# EAGLE board 218_hall (EAGLE 8.1.0)
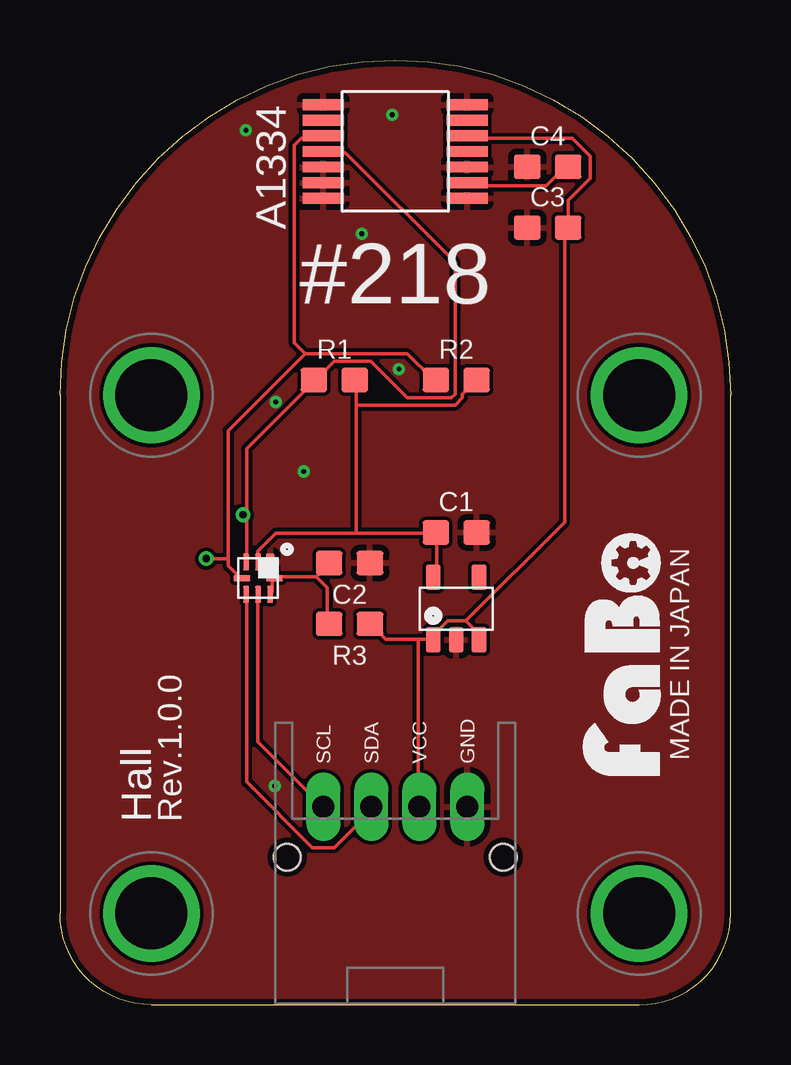
[diagram p0: board, top side]
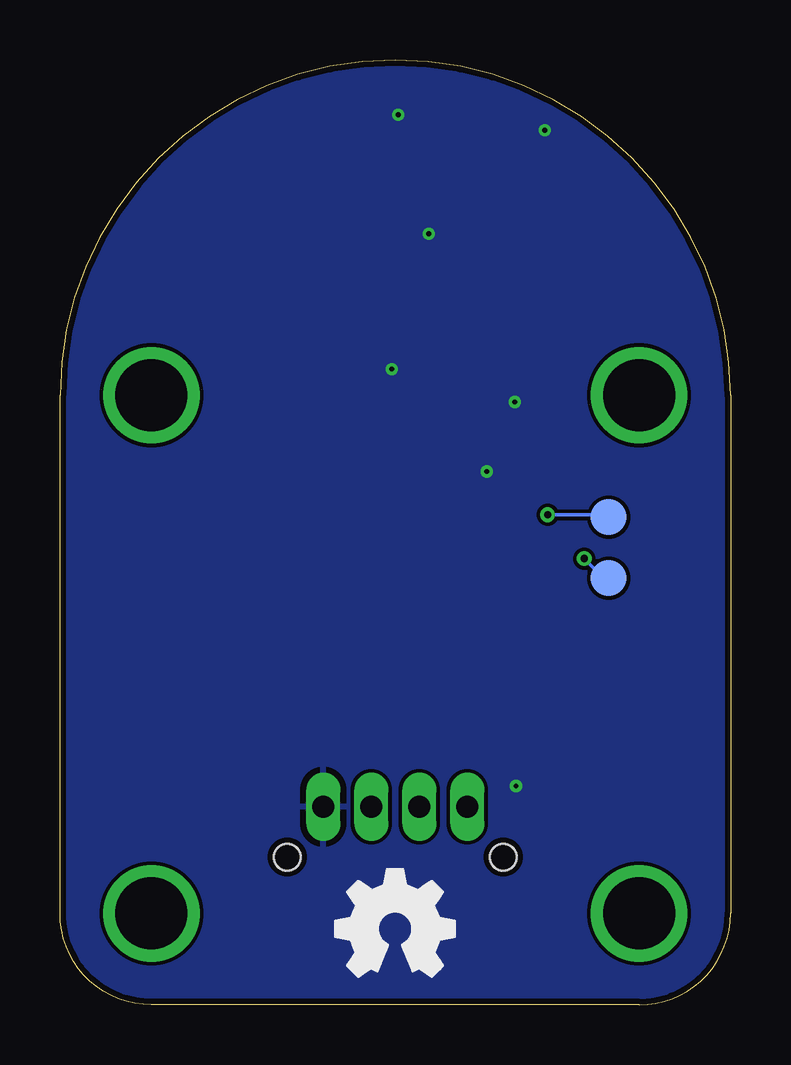
[diagram p1: board, bottom side, seen from below]

Size 27.94 x 39.37 mm. Coordinates in mm from the lower left corner, seen from the top.
Copper layers (1*16): Top 0.035mm / dielectric 1.5mm / Bottom 0.035mm
Design rules "SeeedStudio_2layer_DRU_no_angle_20140221": minimum track width 6mil, minimum drill 12mil, track to track 6mil, track to pad 6mil, pad to pad 6mil, via to via 6mil, smd to smd 0mil, copper to edge 10mil, drill to drill 10mil, minimum pad ring 10mil, minimum via ring 6mil, stop-mask expansion 2mil, vias tented up to drill 100mil, thermal gap 10mil

## Footprints (pad centres in the part's own frame; a part is rotated, then mirrored left to right if it is on the bottom)
LE-14 = smd 0.45 x 1.7: 1 -1.95,-3; 2 -1.3,-3; 3 -0.65,-3; 4 0,-3; 5 0.65,-3; 6 1.3,-3; 7 1.95,-3; 8 1.95,3; 9 1.3,3; 10 0.65,3; 11 0,3; 12 -0.65,3; 13 -1.3,3; 14 -1.95,3
0603 = smd 1.1 x 1: 1 -0.85,0; 2 0.85,0
SOT-23-5 = smd 0.6 x 1.05: 1 -0.95,-1.3; 2 0,-1.3; 3 0.95,-1.3; 4 0.95,1.3; 5 -0.95,1.3
XQFN8 = smd 0.7 x 0.35: 1 -0.675,0.5 | smd 0.7 x 0.25: 2 -0.675,0; 3 -0.675,-0.5; 5 0.675,-0.5; 6 0.675,0; 7 0.675,0.5 | smd 0.25 x 0.7: 4 0,-0.675; 8 0,0.675
FABO_BRICK_I2C = drill 0.9 pad 1.422 long: GND 3,-10.795; SCL -3,-10.795; SDA -1,-10.795; VCC 1,-10.795 | drill 3 pad 3.81: P$1 -10.16,6.35; P$2 10.16,6.35; P$3 -10.16,-15.24; P$4 10.16,-15.24 | hole 1.1: -4.5,-12.895; 4.5,-12.895
TP-15 = smd 1.5 x 1.5: 1 0,0

## Placement (x,y rotation side)
A1334  A1335  [LE-14]  13.97,35.56 90 top
C1  1uF  [0603]  16.51,19.68 180 top
C2  0.1uF  [0603]  12.06,18.41 180 top
C3  0.1uF  [0603]  20.32,32.38 0 top
C4  0.1uF  [0603]  20.32,34.92 0 top
IC2  [SOT-23-5]  16.51,16.51 0 top
IC3  [XQFN8]  8.26,17.78 270 top
J1  [FABO_BRICK_I2C]  13.97,19.05 0 top
R1  4.7k  [0603]  11.43,26.04 0 top
R2  4.7k  [0603]  16.51,26.04 0 top
R3  200k  [0603]  12.06,15.88 0 top
TP1  [TP-15]  5.08,17.78 0 bottom
TP2  [TP-15]  5.08,20.32 0 bottom
U$2  [LOGO_OSHW_M_BOTTOM]  13.97,3.17 0 top
U$3  [LOGO_FABO_MS]  25.4,14.61 90 top

## Library data of the parts
A1334 = FaBo-Sensor
C1-C4 = FaBo-Capacitor
IC2 TP1 TP2 = FaBo-Supply
IC3 = FaBo-LevelTranslator
J1 = FaBo-Template
R1-R3 = FaBo-Resistors
U$2 U$3 = FaBo-etc

## Nets
3V3: C1.2 IC2.5 IC3.2 R1.2 R2.2
5V: A1334.5 C3.2 IC2.1 IC2.3 J1.VCC R3.2
GND: A1334.1 A1334.3 A1334.7 A1334.8 A1334.12 A1334.13 A1334.14 C1.1 C2.1 C3.1 C4.1 IC2.2 IC3.1 J1.GND
N$1: A1334.2 C4.2
N$2: C2.2 IC3.7 IC3.8 R3.1
SCL: A1334.11 IC3.3 R1.1 TP2.1
SCL_HV: IC3.6 J1.SCL
SDA: A1334.10 IC3.4 R2.1 TP1.1
SDA_HV: IC3.5 J1.SDA

## Tracks (layer width: path | path; a pad name or v marks a point on that pad's centre or on a via)
3V3
  Top 0.152: 12.34,19.66 15.54,19.66 C1.2 15.7,19.66 15.7,17.83 IC2.5 | 12.34,19.66 8.99,19.66 8.23,18.9 8.23,18.59 IC3.2 | 12.34,19.66 12.34,24.99 | 12.34,24.99 12.34,25.91 R1.2 | 12.34,24.99 16.46,24.99 16.76,25.3 16.76,25.45 17.22,25.91 R2.2
5V
  Top 0.152: A1334.5 17.07,36.12 21.34,36.12 22.1,35.36 22.1,34.44 21.18,33.53 21.18,32.46 C3.2 21.03,32.31 21.03,20.12 16.92,16 | 14.94,15.24 13.56,15.24 12.95,15.85 R3.2 | 14.94,15.24 15.39,15.24 | 15.39,15.24 15.54,15.24 IC2.1 15.39,15.24 | 16.92,16 17.37,15.54 17.37,15.24 IC2.3 | 16.92,16 16.15,16 15.39,15.24 | 14.94,15.24 14.94,8.38 J1.VCC
GND  (via drill 0.2)
  other vias: 10.16,22.23 14.12,26.49 8.94,9.12 8.99,25.12 7.75,36.45 13.84,37.08 12.57,32.13
  pour Bottom: 0,0 27.94,0 27.94,39.37 0,39.37
  pour Top: 0,0 27.94,0 27.94,39.37 0,39.37
N$1
  Top 0.152: C4.2 21.03,34.9 20.27,34.14 17.07,34.14 A1334.2
N$2
  Top 0.152: IC3.7 8.84,17.22 8.84,17.68 IC3.8 8.99,17.83 10.67,17.83 | 10.67,17.83 11.12,18.29 C2.2 | 10.67,17.83 11.12,17.37 11.12,16 R3.1
SCL  (via drill 0.3)
  Top 0.152: 7.77,20.42 7.77,23.16 10.52,25.91 R1.1 10.67,26.06 11.43,26.82 12.95,26.82 14.48,25.3 16.31,25.3 16.46,25.45 16.46,30.94 11.89,35.51 10.97,35.51 A1334.11 | 7.77,20.42 7.77,18.59 IC3.3 | 7.77,20.42 v7.62,20.42
  Bottom 0.152: v7.62,20.42 5.18,20.42 TP2.1
SCL_HV
  Top 0.152: IC3.6 8.23,17.07 8.23,10.97 10.82,8.38 J1.SCL
SDA  (via drill 0.3)
  Top 0.152: 7.01,18.59 7.01,23.93 10.21,27.13 | 7.01,18.59 7.01,18.29 7.47,17.83 IC3.4 | 10.21,27.13 14.48,27.13 15.54,26.06 R2.1 | 7.01,18.59 v6.1,18.59 | 10.21,27.13 9.75,27.58 9.75,35.81 10.06,36.12 10.82,36.12 A1334.10
  Bottom 0.152: v6.1,18.59 5.64,18.14 5.49,18.14 5.18,17.83 TP1.1
SDA_HV
  Top 0.152: IC3.5 7.77,17.07 7.77,9.3 10.52,6.55 11.43,6.55 13.11,8.23 J1.SDA

## Text on the board
tPlace: #218 | MADE IN JAPAN | Hall | Rev.1.0.0